# Altium PCB TPS61022.PcbDoc
Units mm, origin at the board's own origin, x right, y up, seen from the top; angles counter-clockwise.
Board outline 46.35 x 19.18 mm, 2 copper layers (Top Layer, Bottom Layer); 8 components, 5 nets, 21 pads, 0 vias.
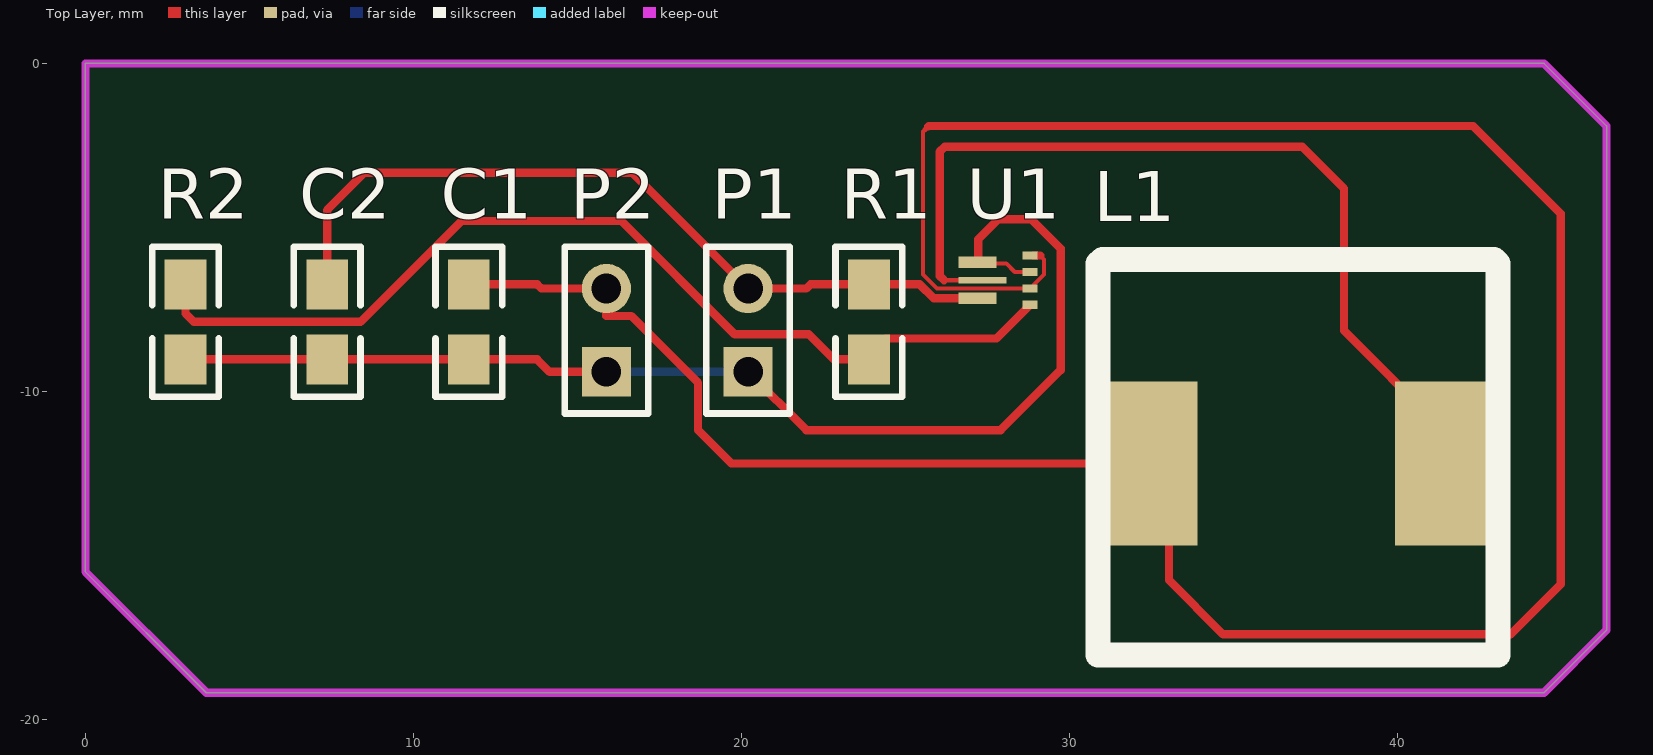
[diagram p0: Top Layer view]
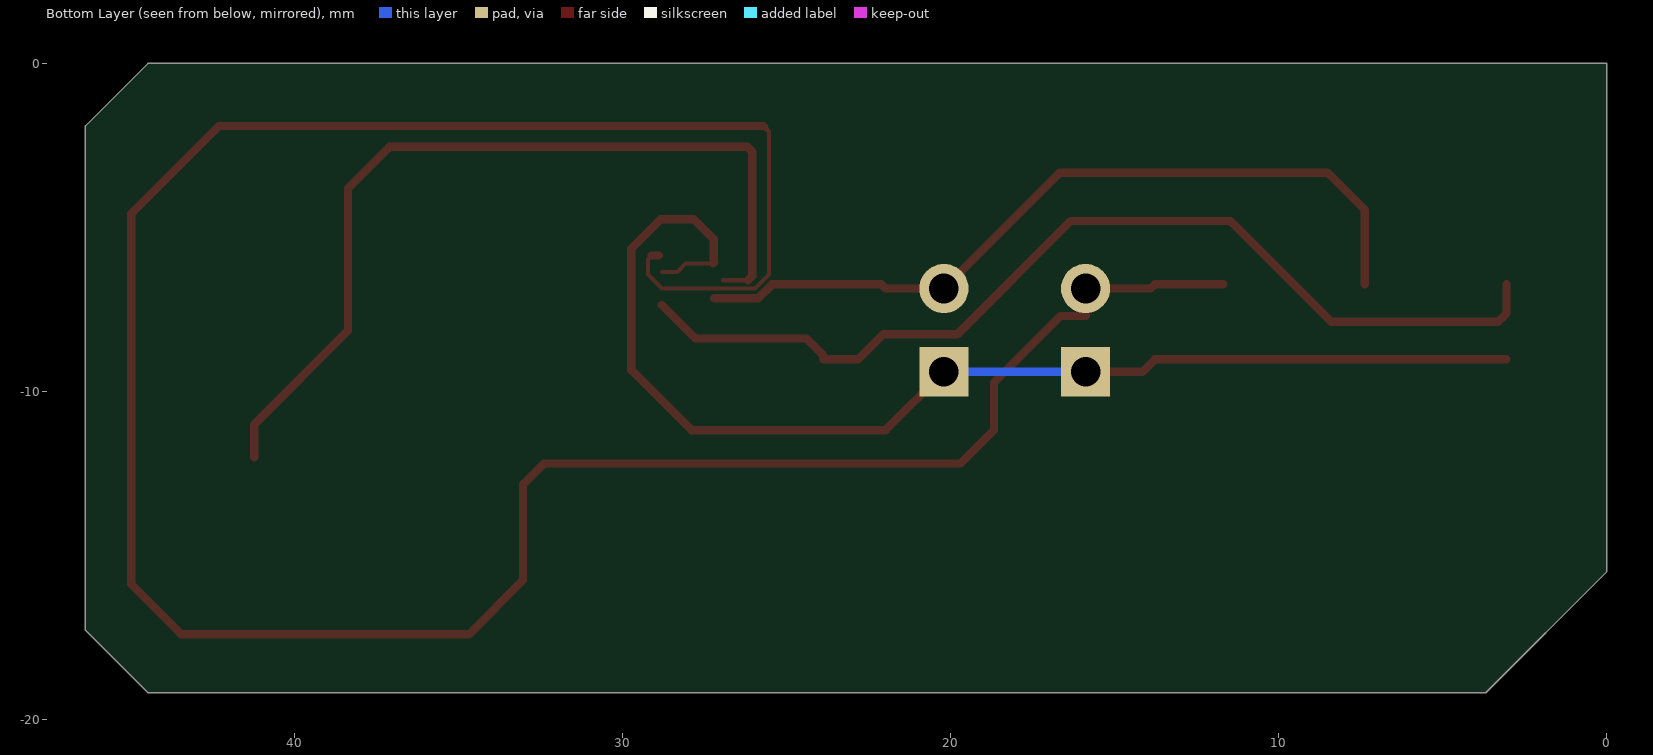
[diagram p1: Bottom Layer view, seen from below]

## Layer stack, top to bottom
Top Solder: solder mask 0.0102, Solder Resist, Dk 3.5
Top Layer: signal copper 0.0356
Dielectric 1: dielectric 0.32, FR-4, Dk 4.8
Bottom Layer: signal copper 0.0356
Bottom Solder: solder mask 0.0102, Solder Resist, Dk 3.5

## Board outline
0,-15.494 3.683,-19.177 44.45,-19.177 46.355,-17.272 46.355,-1.905 44.45,0 0,0

## Design rules (kind name [scope] priority, off if disabled: settings)
Clearance [All] p1: gap=0.254 ignorepadtopadclearanceinfootprint=FALSE except(0: Arc-Hole Track-Hole SMDPad-Hole THPad-Hole Via-Hole Fill-Hole Poly-Hole Region-Hole Text-Hole)
PolygonConnect [All] p1: connectstyle=Relief reliefconductorwidth=0.254 reliefentries=4 polygonreliefangle="90 Angle" airgapwidth=0.254
RoutingVias [All] p1: holewidth=0.711 width=1.27 viastyle="Through Hole" minholewidth=0.711 minwidth=1.27 maxholewidth=0.711 maxwidth=1.27
SolderMaskExpansion [All] p1: expansion=0.102
Width [All] p1: maxlimit=0.254 minlimit=0.254 preferedwidth=0.254
30 further rules are at their usual default settings.

## Components (designator, comment, footprint, x,y, rotation, side; value= is the part's Value field where it differs from the comment)
C1 "10uf" 0805 11.684,-9.017 r90 top
C2 "15uf" 0805 7.366,-9.017 r90 top
L1 "1uh" L 30.861,-18.034 r0 top
P1 "Header 2" HDR1X2 20.193,-9.398 r90 top
P2 "Header 2" HDR1X2 15.875,-9.398 r90 top
R1 "Res" 0805 23.876,-9.017 r90 top
R2 "Res" 0805 3.048,-9.017 r90 top
U1 "TPS61022RWUR" RWU0007A 26.289,-6.731 r0 top value=Value

## Footprints (in the part's own frame and the unit in brackets; to place one, negate y for a bottom-side part, rotate by r counter-clockwise, add the part's x,y. Pads: shape width x height; smd on the part's side, far side on the other; paste and mask are expansions set on the pad)
0805 [mil]
  rect 60x50 smd: 1(0,0) 2(90,0)
  silkscreen extent -45,-40 135,40
HDR1X2 [mm] "Connector; Header; 2 Position"
  rect 1.5x1.5 hole 0.9: 1(0,0)
  round 1.5 hole 0.9: 2(2.54,0)
  silkscreen extent -1.27,-1.27 3.81,1.27
L [mm] "贴片功率电感12*12"
  rect 3x5 smd: 1(1.524,5.842) 2(10.541,5.842)
  silkscreen extent 0,0 12.19,12.06
RWU0007A [mm]
  rect 1.15x0.35 smd paste-0.562 mask+0: 1(0.899,0.677) 3(0.899,-0.423)
  rect 1.45x0.2 smd paste-0.712 mask+0: 2(1.049,0.127)
  rect 0.45x0.25 smd paste+0 mask+0: 4(2.499,-0.623) 5(2.499,-0.123) 6(2.499,0.377) 7(2.499,0.877)
  body extent 1.52,0.13 1.78,0.38, height 0.25

## Part data
C1 C2: library part C, "电容"
L1: library part L, "大号贴片电感"
P1 P2: "Header, 2-Pin", LatestRevisionDate=17-Jul-2002, LatestRevisionNote="Re-released for DXP Platform.", Publisher="Altium Limited"
R1 R2: library part R, "电阻"
U1: "Imported", Manufacturer="Texas Instruments", PartNumber=TPS61022RWUR, RefDes=RefDes, TYPE=TYPE

## Nets (pads, with @x,y where several pads share a name; then routed paths per layer and width w, separated by ;. In a path a pad name is that pad's centre, name@x,y a point inside that pad or via, vN(x,y) a via of type N, cw(c..) or ccw(c..) an arc to the next point about the centre after c; other vN are vias at no path point)
GND: C1.1 C2.1 P1.1 P2.1 R2.1 U1.1 U1.6 | length 37.6
  Top Layer w0.127: U1.1@27.23,-6.096 28.063,-6.096 28.321,-6.354 U1.6
  Top Layer w0.254: R2.1 C2.1 C1.1 13.767,-9.017 14.148,-9.398 P2.1 ; P1.1 21.971,-11.176 27.889,-11.176 29.718,-9.347 29.718,-5.639 28.829,-4.75 27.813,-4.75 27.203,-5.359 27.203,-6.054 U1.1 U1.1@27.23,-6.096
  Bottom Layer w0.254: P2.1 P1.1
NetC1_2: C1.2 L1.1 P2.2 U1.5 U1.7 | length 82.4
  Top Layer w0.127: 25.695,-1.905 25.527,-2.073 25.527,-6.432 25.949,-6.854 U1.5@28.69,-6.854 ; U1.5 29.21,-6.432 29.21,-5.969 29.095,-5.854
  Top Layer w0.254: C1.2 13.767,-6.731 13.894,-6.858 P2.2 15.875,-7.696 16.637,-7.696 18.669,-9.728 18.669,-11.176 19.685,-12.192 L1.1 33.02,-12.827 33.02,-15.748 34.671,-17.399 43.434,-17.399 44.958,-15.875 44.958,-4.572 42.291,-1.905 25.695,-1.905 ; U1.7@28.886,-5.854 29.095,-5.854
NetC2_2: C2.2 P1.2 R1.2 U1.3 | length 24.2
  Top Layer w0.254: C2.2 7.366,-4.47 8.509,-3.327 16.662,-3.327 P1.2 21.971,-6.858 22.098,-6.731 R1.2 25.425,-6.731 25.848,-7.154 U1.3
NetL1_2: L1.2 U1.2 | length 27
  Top Layer w0.127: 26.162,-6.604 U1.2@26.924,-6.604
  Top Layer w0.254: 26.162,-6.604 26.035,-6.477 26.035,-2.689 26.184,-2.54 37.084,-2.54 38.354,-3.81 38.354,-8.144 41.211,-11.001 L1.2@41.211,-12.001
NetR1_1: R1.1 R2.2 U1.4 | length 30.5
  Top Layer w0.254: R2.2 3.048,-7.62 3.302,-7.874 8.382,-7.874 11.455,-4.801 16.332,-4.801 19.787,-8.255 22.047,-8.255 22.809,-9.017 R1.1 23.876,-8.89 24.384,-8.382 27.766,-8.382 U1.4@28.788,-7.36

## Keep-outs
Top Layer:
  the board outline again, w0.254